# Altium PCB Placa-PCB.PcbDoc
Units mil, origin at the board's own origin, x right, y up, seen from the top; angles counter-clockwise.
Board outline 1725 x 1275 mil, 2 copper layers (Top Layer, Bottom Layer); 14 components, 7 nets, 36 pads, 5 vias.
Unrouted connection lines stored in the file: 1.
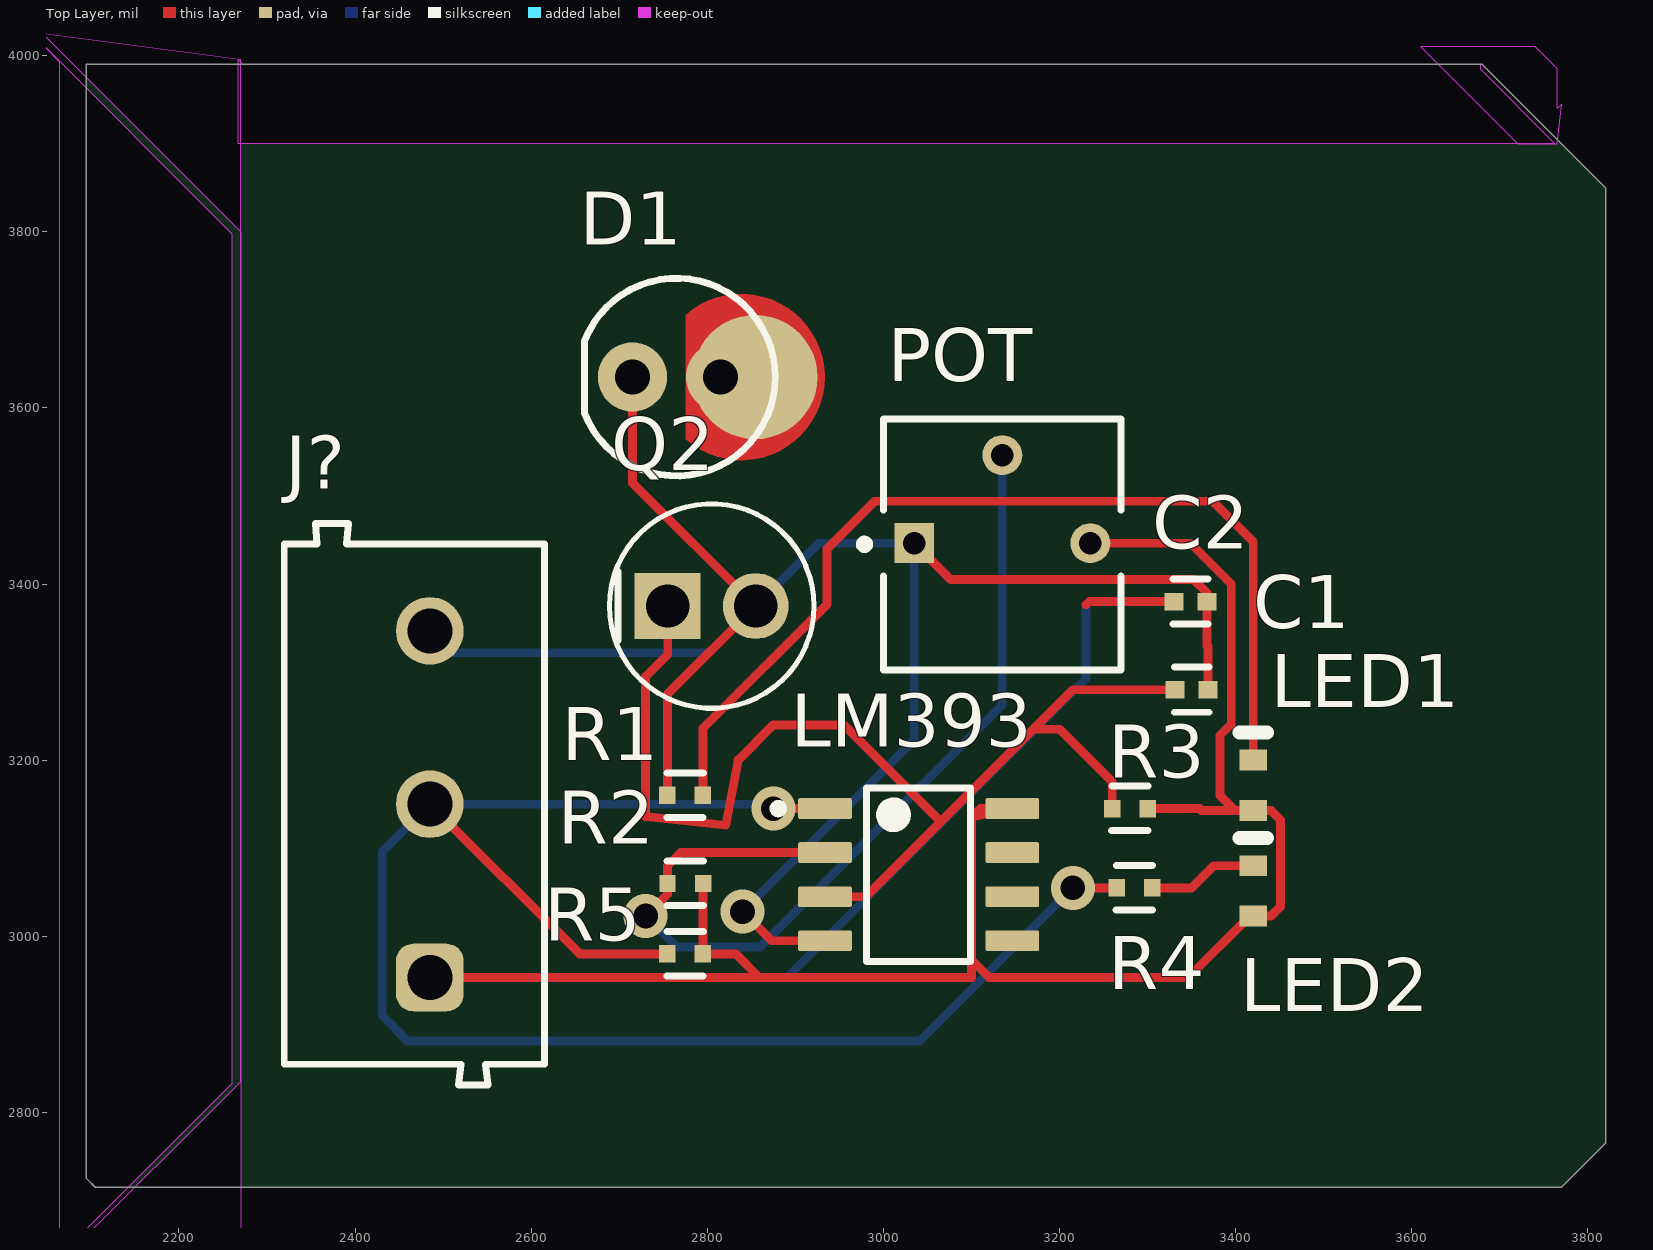
[diagram p0: Top Layer view]
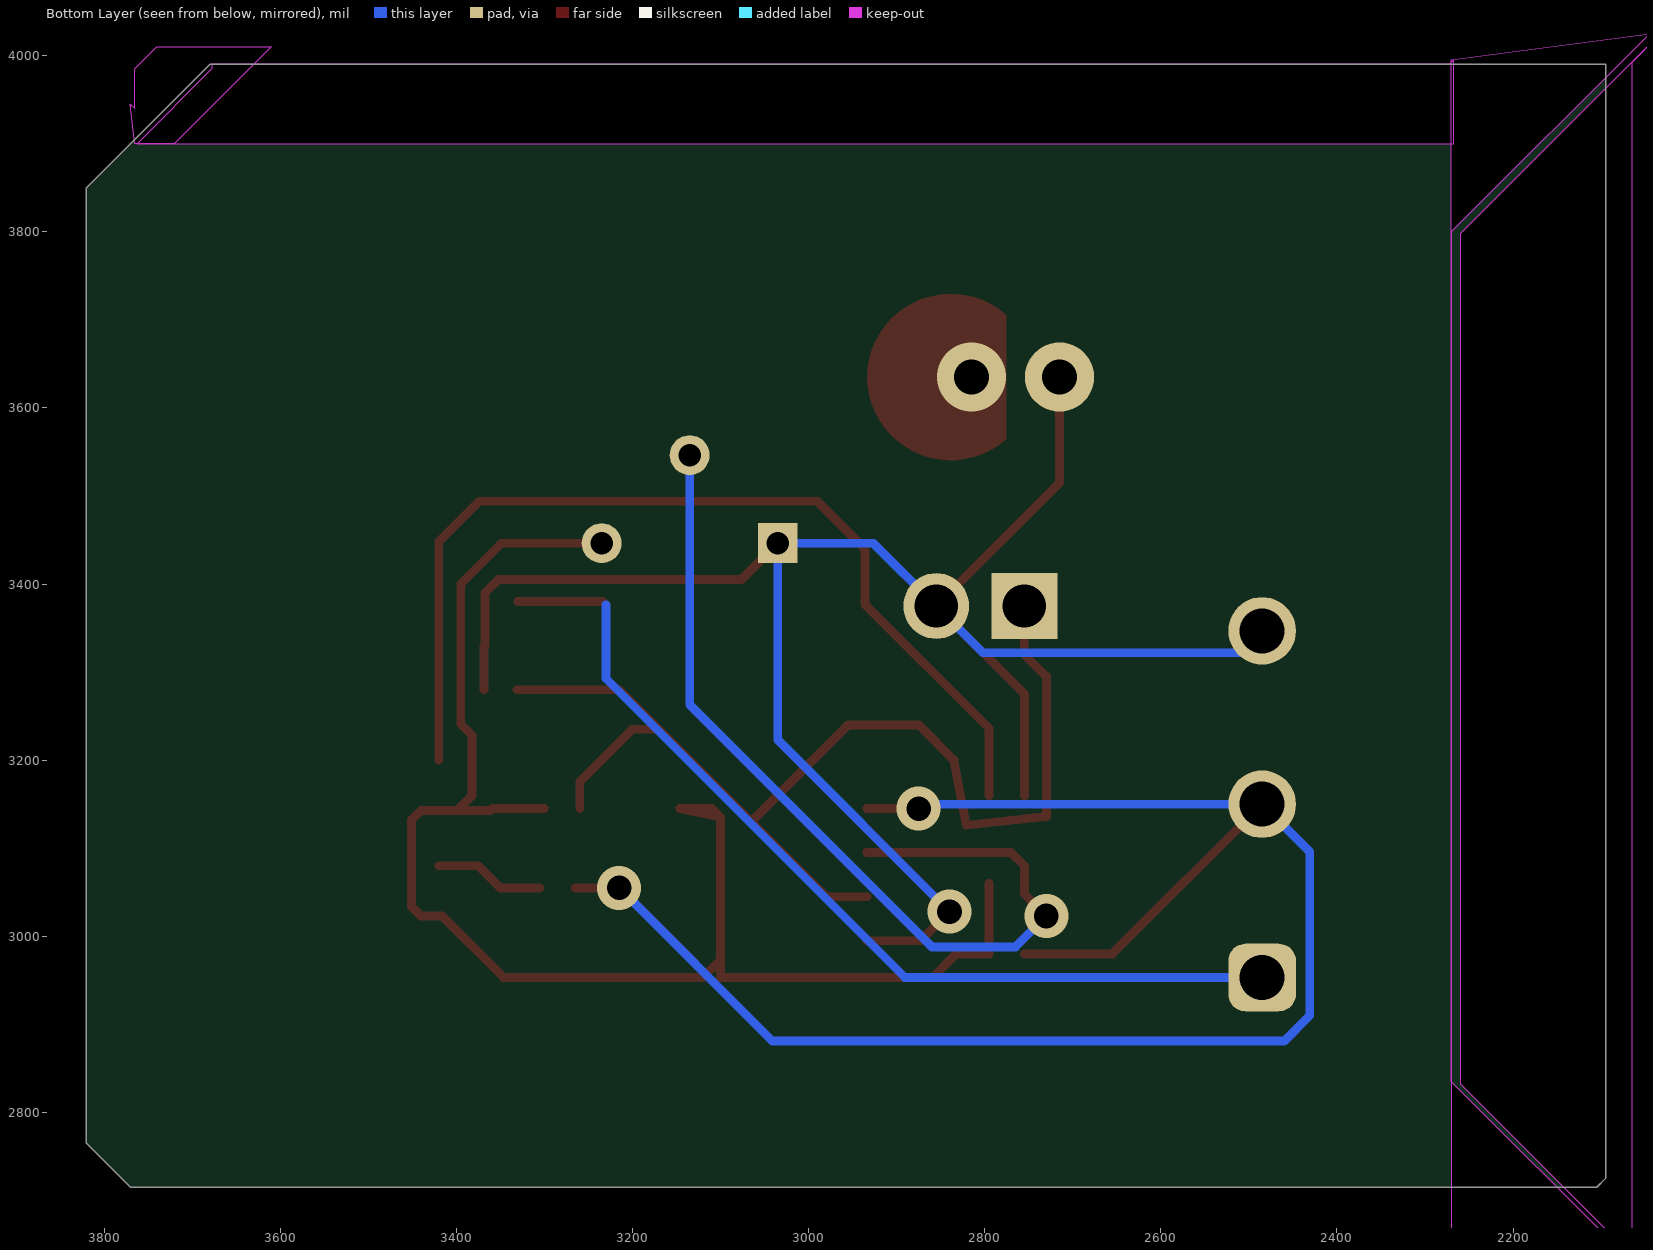
[diagram p1: Bottom Layer view, seen from below]
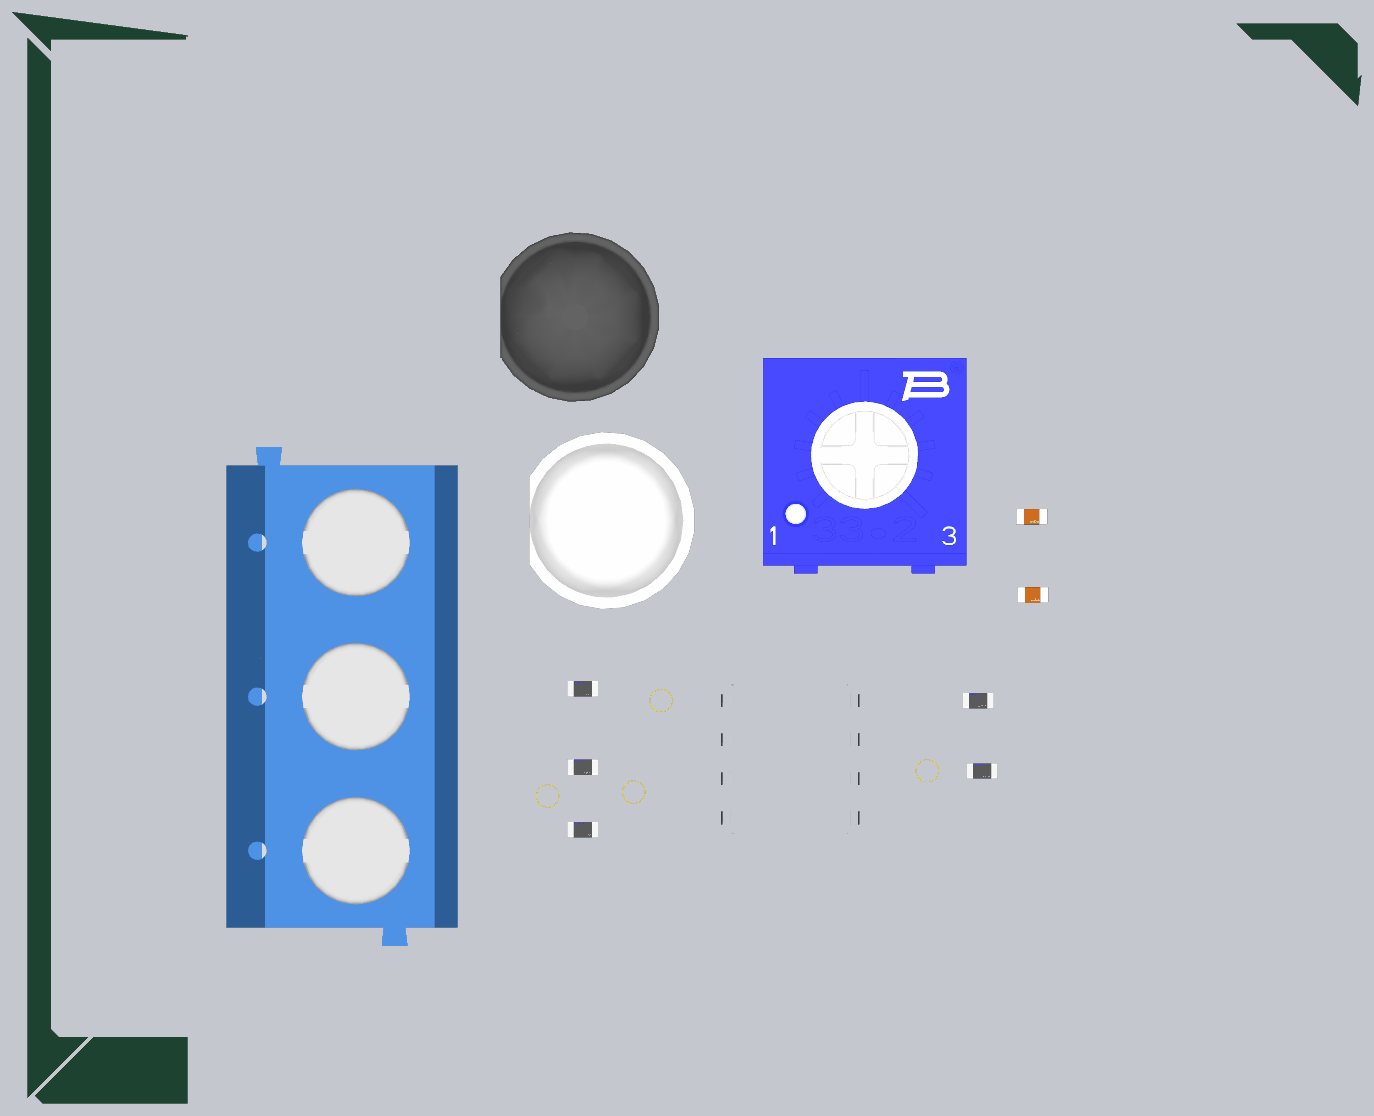
[diagram p2: 3D render of the assembled board from above, using the file's embedded part models]

## Layer stack, top to bottom
Top Solder: solder mask 0.4, Solder Resist, Dk 3.5
Top Layer: signal copper 1.4
Dielectric 1: dielectric 12.6, FR-4, Dk 4.8
Bottom Layer: signal copper 1.4
Bottom Solder: solder mask 0.4, Solder Resist, Dk 3.5

## Board outline
2105,2715 2095,2725 2095,3990 3680,3990 3820,3850 3820,2765 3770,2715
cut-out: 3770,3945 3765,3940 3765,3985 3740,4010 3610,4010 3720,3900 3765,3900
cut-out: 2267.5,3995 2272.5,3990 3677.5,3990 3677.5,3985 3762.5,3900 2267.5,3900
cut-out: 2260,3797.5 2260,2832.5 2065,2637.5 2065,3992.5 2035,4022.5
cut-out: 2045,4025 2270,3800 2270,2630 2085,2630 2075,2640 2270,2835 2270,3995

## Design rules (kind name [scope] priority, off if disabled: settings)
Clearance [All] p1: gap=10 ignorepadtopadclearanceinfootprint=FALSE
PolygonConnect [All] p1: connectstyle=Relief reliefconductorwidth=10 reliefentries=4 polygonreliefangle="90 Angle" airgapwidth=10
RoutingVias [All] p1: holewidth=28 width=50 viastyle="Through Hole" minholewidth=28 minwidth=50 maxholewidth=28 maxwidth=50
SolderMaskExpansion [All] p1: expansion=4 istentingtop=FALSE
SupplyNets "Schematic Supply Nets_1" [InNet('VCC')] p1: voltage=0.000
SupplyNets "Schematic Supply Nets" [InNet('GND')] p2: voltage=0.000
Width [All] p1: maxlimit=10 minlimit=0.15 preferedwidth=0.25 bottomlayer_prefwidth=0.24 minimp=50.000000 maximp=50.000000 favimp=50.000000
30 further rules are at their usual default settings.

## Components (designator, comment, footprint, x,y, rotation, side; value= is the part's Value field where it differs from the comment)
C1 "GRM1555C1H120GA01D" FP-GRM155-0_05-MFG 3350,3280 r0 top (schematic designator C?)
C2 "GRM1555C1H120GA01D" FP-GRM155-0_05-MFG 3348.7,3380 r0 top (schematic designator C?)
D1 "SFH 4546" FP-SFH_4546-MFG 2765,3635 r0 top
J? "691102710003" 691102710003 2467.28,3150 r90 top
LED1 "TLMS1000-GS08" VISH-TLMS1000_V 3420,3171.46 r90 top
LED2 "TLMS1000-GS08" VISH-TLMS1000_V 3420,3051.46 r90 top
LM393 "LM393ADR" FP-D0008A-MFG 3040,3070 r0 top (schematic designator U?)
POT "3362P-1-252LF" FP-3362P-MFG 3135,3445 r0 top
Q2 "TEPT5600" FP-6_544-5185_03-4-MFG 2805,3375 r0 top
R1 "ERJ-2RKF1502X" FP-ERJ2R-MFG 2774.82,3160 r0 top value=15kΩ
R2 "ERJ-2RKF1502X" FP-ERJ2R-MFG 2775,3060 r0 top value=15kΩ
R3 "ERJ-2RKF1502X" FP-ERJ2R-MFG 3280,3145 r0 top value=15kΩ
R4 "ERJ-2RKF1502X" FP-ERJ2R-MFG 3285,3055 r0 top value=15kΩ
R5 "ERJ-2RKF1502X" FP-ERJ2R-MFG 2774.82,2980 r0 top value=15kΩ

## Footprints (in the part's own frame and the unit in brackets; to place one, negate y for a bottom-side part, rotate by r counter-clockwise, add the part's x,y. Pads: shape width x height; smd on the part's side, far side on the other; paste and mask are expansions set on the pad)
691102710003 [mm] "5,00mm - modular - blue - Horizontal entry with pressure clamp - 9,9 mm height - 03p"
  rrect50% 1.95x1.95 hole 1.3: 1(-5,-0.45)
  round 1.95 hole 1.3: 2(0,-0.45) 3(5,-0.45)
  silkscreen extent -8.1,-3.75 8.1,3.75, body extent -8.1,-3.75 8.1,3.75, height 9.96
FP-6_544-5185_03-4-MFG [mm]
  rect 1.9x1.9 hole 1.25 paste-2539.97 mask+0: 1(-1.27,0)
  round 1.9 hole 1.25 paste-2539.97 mask+0: 2(1.27,0)
  silkscreen extent -2.95,-2.95 2.95,2.95, body extent -3.05,-3.05 3.05,3.05, height 0.25
FP-3362P-MFG [mm]
  rect 1.15x1.15 hole 0.65 paste-2539.97 mask+0: 1(-2.54,0.035)
  round 1.15 hole 0.65 paste-2539.97 mask+0: 2(0,2.575) 3(2.54,0.035)
  silkscreen extent -4.1,-3.62 3.42,3.62, body extent -3.52,-3.72 3.52,3.72, height 0.25
FP-D0008A-MFG [mm]
  rrect17% 1.55x0.6 smd paste+0 mask+0: 1(-2.7,1.905) 2(-2.7,0.635) 3(-2.7,-0.635) 4(-2.7,-1.905) 5(2.7,-1.905) 6(2.7,-0.635) 7(2.7,0.635) 8(2.7,1.905)
  silkscreen extent -4.17,-2.5 1.5,2.5, body extent -3.57,-2.75 3.57,2.75, height 0.25
FP-ERJ2R-MFG [mm]
  rect 0.475x0.5 smd paste+0 mask+0: 1(-0.512,0) 2(0.513,0)
  silkscreen extent -0.53,-0.64 0.52,0.65, body extent -0.85,-0.38 0.85,0.38, height 0.25
FP-GRM155-0_05-MFG [mm]
  rect 0.55x0.5 smd paste+0 mask+0: 1(-0.475,0) 2(0.475,0)
  silkscreen extent -0.5,-0.65 0.5,0.65, body extent -0.85,-0.38 0.85,0.38, height 0.25
FP-SFH_4546-MFG [mm]
  round 2 hole 1 paste-2539.97 mask+0: 1(-1.27,0)
  round 3.594 smd paste-1000 mask-1000: ""(2.27,0)
  Top Layer region: 0.27,1.789 1.231,2.313 2.324,2.357 3.324,1.91 4.02,1.066 4.27,0 4.27,0 4.02,-1.066 3.324,-1.91 2.324,-2.357 1.231,-2.313 0.27,-1.789 0.27,-1.789
  silkscreen extent -2.65,-2.85 2.85,2.85, body extent -2.95,-2.95 4.37,2.95, height 0.25
VISH-TLMS1000_V [mm] "SMD, 2-Leads, Body 0.8x1.6mm"
  rect 0.6x0.8 smd: 1(-0.725,0) 2(0.725,0)
  silkscreen extent 1.52,-0.4 1.52,0.4, body extent -0.8,-0.4 0.8,0.4, height 0.65

## Part data
C1 C2: library part CMP-2008-03945-2, "CAP CER 12PF 50V C0G/NP0 0402", Capacitance=12pF, Case Code (Imperial)=0402, Case Code (Metric)=1005, Dielectric=C0G, Max Operating Temperature=125°C, Min Operating Temperature=-55°C, Package Quantity=10000, Tolerance=2%, Voltage=50V, Case/Package=0402, Construction=Flat, Depth=0.5mm, Height=0.5mm, Lead Free="Lead Free", Length=1mm, Material=Ceramic, Mount="Surface Mount", Packaging="Tape and Reel", Radiation Hardening=No, REACH SVHC="No SVHC", Series=GRM, Termination=SMD/SMT, Thickness=0.022inch, Voltage Rating=50V, Voltage Rating (DC)=50V, Width=0.5mm
D1: library part CMP-62016-000058-1, "EMITTER IR 950NM 100MA RADIAL", Case/Package=Radial, Forward Current=100mA, Forward Voltage=1.5V, Max Operating Temperature=100°C, Max Power Dissipation=180mW, Min Operating Temperature=-40°C, Package Quantity=1000, Power Dissipation=180W, Reverse Voltage=5V, Contact Plating=Tin, Depth=5.7mm, Fall Time=12ns, Length=5.7mm, Lens Style=Dome, Mount="Through Hole", Number of Elements=1, Number of LEDs=1, Number of Pins=2, Orientation="Top View", Packaging=Bulk, Power Rating=180mW, Radiation Hardening=No, Rise Time=12ns, RoHS Compliant=Yes, Series=-, Test Current=100mA, Touchscreen="Infrared (IR)", Viewing Angle=40°, Wavelength=950nm
J?: library part CMP-1502-03259-2, Color=Blue, Current=15A, Max Operating Temperature=105°C, Min Operating Temperature=-40°C, Voltage=300V, Contact Material=Brass, Contact Plating=Tin, Current Rating=15A, Height=13.4mm, Housing Material=Nylon, Lead Pitch=5mm, Length=7.5mm, Mount="Through Hole", NexarPartId=8917707, Number of Contacts=3, Number of Levels=1, Number of Pins=3, Number of Positions Per Level=3, Packaging=Box, Pitch=5.0038mm, Plating=Steel, REACH SVHC=Unknown, RoHS=Compliant, Stripping Length=-6mm, Termination=Screw, Voltage Rating=300V, Width=16.2mm, Wire Gauge (Max)=22AWG, Wire Gauge (Min)=14AWG, Wire/Cable Gauge=22AWG
LED1 LED2: library part CMP-2000-07254-1, "Low Current LED, 40 mW, 1.8 V, -40 to 100 degC, 2-Pin SMD (0603), RoHS, Tape and Reel", Forward Current If=2mA, Forward Voltage=1.8V, LED Colour=Red, Manufacturer=Vishay, Package Description="2-Pin Surface Mount Device, Body 1.6 x 0.8 mm", Package Reference=TLMS1000, Automotive Qualification Standard=AEC-Q100, Bulb Size=1.6mmx0.8mm, Datasheet URL=https://datasheet.ciiva.com/5798/1698881-5798337.pdf, Datasheet Version="Rev. 1.7, 02/2011", LED Mounting=SMD, Lens Shape=Rectangular, Luminous Intensity=4mcd, Manufacturer URL=http://www.vishay.com/, Mounting Technology=SurfaceMount, MSL=MSL2-1year, Packaging=CutTape, Product Range=-, SVHC=ToBeAdvised, Viewing Angle=80°, Wavelength Typ=636nm
LM393: library part CMP-04896-000011-1, "IC DUAL DIFF COMPARATOR 8-SOIC", Ambient Temperature Range High=+70°C, Ambient Temperature Range Low=0°C, Input Bias Current=-0.025uA, Input Offset Voltage=1mV, Manufacturer="Texas Instruments", Max Junction Temp=+150°C, Max Supply Voltage=30V, Min Supply Voltage=2V, Nominal Supply Current=0.6mA, Package=D0008A, Temperature="0°C to +70°C", Voltage Gain=200V/mV, Automotive=No, Category=IC, ComponentLink2Description=Datasheet, ComponentLink2URL=http://www.ti.com/lit/ds/symlink/lm393a.pdf, Device Class L1="Integrated Circuits (ICs)", Device Class L2="Linear ICs", Device Class L3=Comparators, Digikey Description="IC DUAL DIFF COMPARATOR 8-SOIC", Height=1.75mm, Lead Free=Yes, Manufacturer Part Number=LM393ADR, Mouser Description="Analog Comparators Dual Diff A Grade", Number of Channels=2, Octopart=https://octopart.com/lm393adr-texas+instruments-428362, Response Time=1.3us, RoHS=TRUE, Standoff Height=0.11mm, Temperature Range High=+70°C, Temperature Range Low=0°C
POT: library part CMP-00059-10485830-1, "3362P-1-252LF 1/4\" Sq, Thru-Hole, TRIMMER, 2.5 Kilohms, Cermet, Single Turn", Max Operating Temperature=125°C, Max Power Dissipation=500mW, Min Operating Temperature=-55°C, Resistance=2.5kΩ, Temperature Coefficient=100ppm/°C, Tolerance=10%, Composition=Cermet, Depth=6.99mm, Height=4.699mm, Length=6.6mm, Military Standard=Not, Mount="Through Hole", NexarPartId=10485830, Number of Turns=1, Power Rating=500mW, Radiation Hardening=No, REACH SVHC="No SVHC", RoHS=Compliant, Schedule B="8533400080, 8533400080", Termination=Pin, Width=6.604mm
Q2: library part CMP-02533-000004-1, "SENSOR PHOTO 570NM TOP VIEW RAD", Case/Package=Radial, Collector Emitter Breakdown Voltage=6V, Dark Current=50nA, Max Collector Current=20mA, Max Operating Temperature=85°C, Max Power Dissipation=100mW, Min Operating Temperature=-40°C, Operating Supply Voltage=5V, Package Material=SILICON, Package Quantity=4000, Collector Emitter Voltage (VCEO)=6V, Height=8mm, Lead Free="Lead Free", Length=5.75mm, Lens Style=Domed, Mount="Through Hole", Number of Channels=1, Number of Elements=1, Number of Pins=2, Orientation="Top View", Output Type=Analog, Packaging=Bulk, Polarity=NPN, Power Consumption=100mW, Power Dissipation=100mW, Radiation Hardening=No, RoHS Compliant=Yes, Series=-, Viewing Angle=20°, Wavelength=570nm, Width=5.75mm
R1 R2 R3 R4 R5: library part CMP-2002-00694-4, "RES SMD 15K OHM 1% 1/10W 0402", Manufacturer=Panasonic, Package=ERJ2R, Power Rating=0.1W, Resistance=15kΩ, Temperature="-55°C to +155°C", Temperature Coefficient=100ppm/°C, Temperature Range High=+155°C, Temperature Range Low=-55°C, Tolerance=1%, Voltage Rating=50V, Automotive=Yes, Automotive Grade="Grade 0", Category=Res, ComponentLink2Description=Datasheet, ComponentLink2URL=https://industrial.panasonic.com/cdbs/www-data/pdf/RDA0000/AOA0000C304.pdf, Composition="Thick Film", Device Class L1="Passive Components", Device Class L2=Resistors, Device Class L3="Chip SMD Resistors", Digikey Description="RES SMD 15K OHM 1% 1/10W 0402", Footprint Url=https://b2b-api.panasonic.eu/file_stream/pids/fileversion/1180, Height=0.4mm, Lead Free=Yes, Manufacturer Part Number=ERJ-2RKF1502X, Mouser Description="Res Thick Film 1.0 x 0.5 mm 15K Ohm 1% 0.1W(1/10W) 100ppm/ C Molded SMD Punched Carrier T/R", Octopart=https://octopart.com/erj-2rkf1502x-panasonic-55404985, RoHS=TRUE, Series=ERJ

## Via types
v1: diameter 50, hole 28, Top Layer to Bottom Layer, 4 vias
v2: diameter 78.74, hole 39.37, Top Layer to Bottom Layer, 1 vias

## Nets (pads, with @x,y where several pads share a name; then routed paths per layer and width w, separated by ;. In a path a pad name is that pad's centre, name@x,y a point inside that pad or via, vN(x,y) a via of type N, cw(c..) or ccw(c..) an arc to the next point about the centre after c; other vN are vias at no path point)
"Digital Output": J?.2 LM393.1 R4.1 R5.1 | length 1971.1
  Top Layer w10: J?.2 2655,2980 R5.1 ; v1(2875,3145) LM393.1 ; v1(3215,3055) R4.1
  Bottom Layer w10: v1(2875,3145) 2870,3150 J?.2 2431,3096 2431,2910 2460,2881 3041,2881 v1(3215,3055)
GND: C1.2 C2.2 D1.1 J?.3 LM393.4 POT.1 Q2.2 R1.1 | length 2259.2
  Top Layer w10: D1.1 2715,3515 Q2.2 2754.65,3274.65 R1.1 ; v1(2840,3028) 2873,2995 LM393.4 ; POT.1 3076.38,3405 3352.4,3405 3367.4,3390 C2.2 3367.4,3330.3 3368.7,3329 C1.2
  Bottom Layer w10: J?.3 2509.85,3322 2802,3322 Q2.2 2926.38,3446.38 POT.1 3035,3223 v1(2840,3028)
NetC?_1: C1.1 LM393.3 Q2.1 R3.1 | length 1348.1
  Top Layer w10: Q2.1 2755,3320 2730,3295 2730,3136 2821,3126 2835,3200 2875,3240 2955,3240 3065,3130 ; LM393.3 2980,3045 3065,3130 ; R3.1 3259.82,3175.36 3200,3235.18 3170.18,3235.18 ; C1.1 3215,3280 3170.18,3235.18 ; 3065,3130 3170.18,3235.18
NetD1_2: LM393.2 POT.2 R2.1 | length 1069.2
  Top Layer w10: v1(2730,3023) 2754.82,3047.82 R2.1 2754.82,3080 2769.82,3095 LM393.2
  Bottom Layer w10: v1(2730,3023) 2765,2988 2860,2988 3135,3263 POT.2
NetLED1_2: LED1.2 R1.2 | length 1111.8
  Top Layer w10: R1.2 2795,3236 2936,3377 2936,3440 2990,3494 3374,3494 3420,3448 LED1.2
NetLED2_2: LED2.2 R4.2 | length 125.2
  Top Layer w10: R4.2 3350,3055 3375,3080 LED2.2
VCC: C2.1 J?.1 LED1.1 LED2.1 LM393.8 POT.3 R2.2 R3.2 R5.2 | length 3216.4
  Top Layer w10: J?.1 2859,2953.15 ; R2.2 2795.18,3019.18 2795,3019 R5.2 2832.15,2980 2859,2953.15 ; 3230,3376.38 3233.62,3380 C2.1 ; POT.3 3348.62,3446.38 3395,3400 3395,3241 3382,3228 3382,3160 3399.09,3142.91 ; R3.2 3359,3145 3361.09,3142.91 3399.09,3142.91 ; 2859,2953.15 3100,2953.15 3100,2973.15 ; 3100,2973.15 3100,3135 ; 3100,2973.15 3120,2953.15 3346.24,2953.15 3416,3022.91 LED2.1 3440,3022.91 3451,3033.91 3451,3131.91 3440,3142.91 LED1.1 3399.09,3142.91 ; 3100,3135 LM393.8 3110,3145 3100,3135
  Bottom Layer w10: J?.1 2890.49,2953.15 3230,3292.66 3230,3376.38
pads on no net: D1. LM393.5 LM393.6 LM393.7
copper on no net:
  other v2: 2815,3635

## Silkscreen, mask and mechanical layers (free items; w line width, h text height)
Mechanical 1:
  the board outline again, w10